# EAGLE board mMicroSD (EAGLE 6.2)
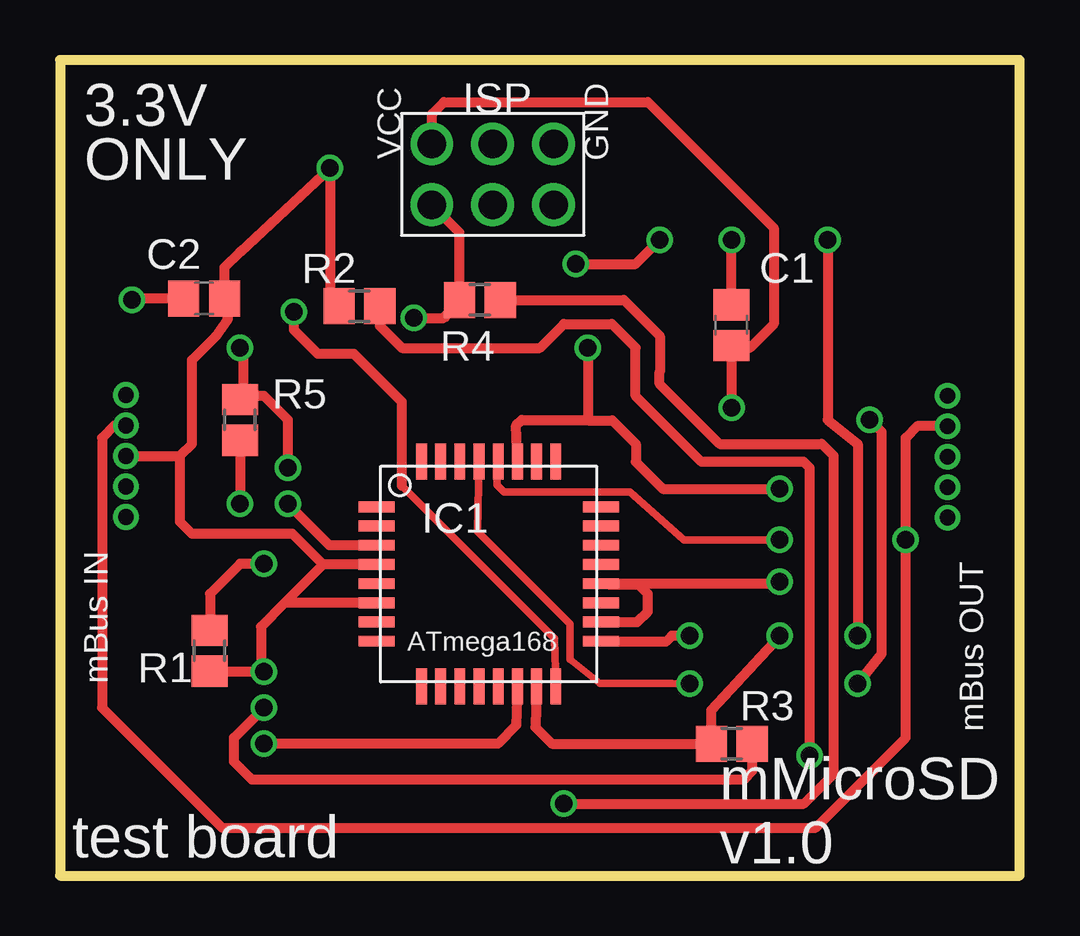
[diagram p0: board, top side]
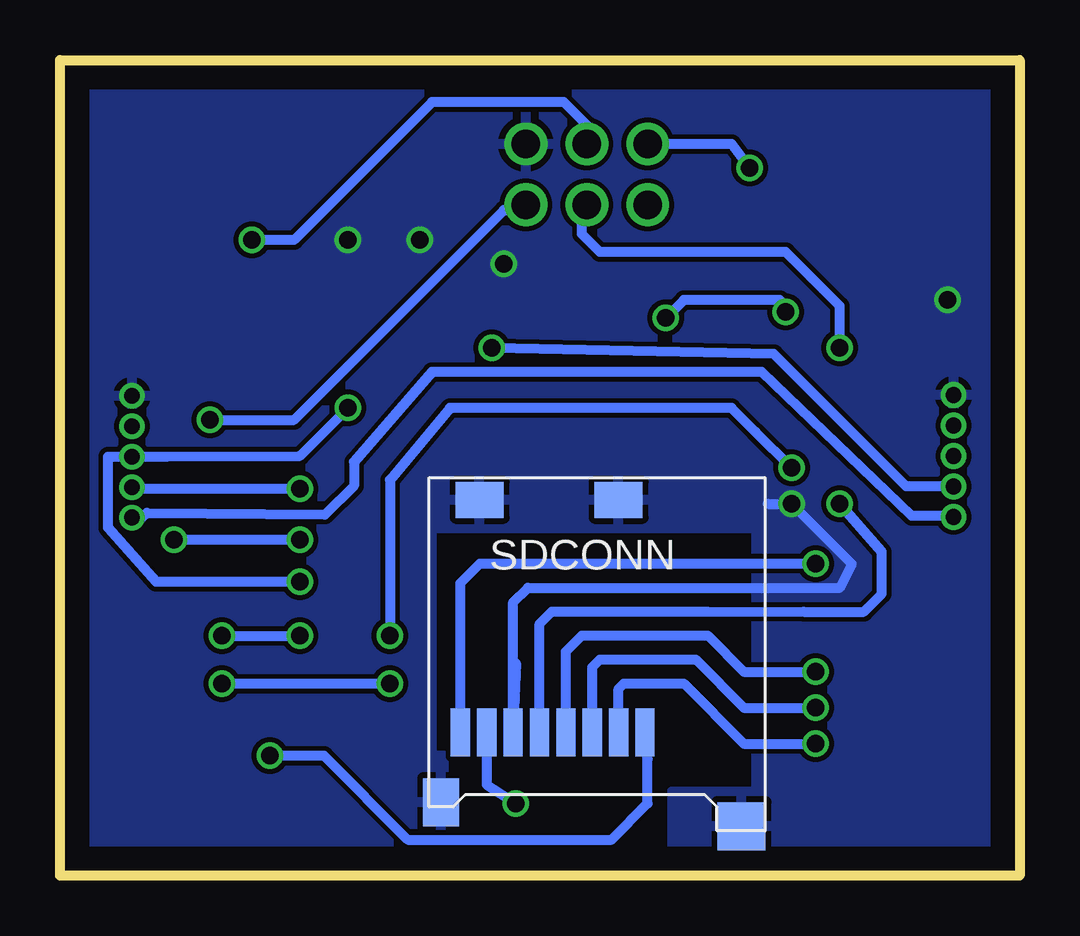
[diagram p1: board, bottom side, seen from below]

Size 40 x 34 mm. Coordinates in mm from the lower left corner, seen from the top.
Outline: 0,0 40,0 40,34 0,34 0,0
Copper layers (1*16): Top 0.035mm / dielectric 1.5mm / Bottom 0.035mm
Design rules: minimum track width 10mil, minimum drill 24mil, track to track 8mil, track to pad 8mil, pad to pad 8mil, via to via 8mil, smd to smd 8mil, copper to edge 40mil, drill to drill 8mil, minimum pad ring 8mil, minimum via ring 8mil, stop-mask expansion 4mil, vias tented up to drill 0mil, thermal gap 10mil

## Footprints (pad centres in the part's own frame; a part is rotated, then mirrored left to right if it is on the bottom)
C0805 = smd 1.3 x 1.5: 1 -0.85,0; 2 0.85,0
ATMEGA168 = smd 1.5 x 0.45: 1 -4.572,2.91; 2 -4.572,2.11; 3 -4.572,1.31; 4 -4.572,0.51; 5 -4.572,-0.29; 6 -4.572,-1.09; 7 -4.572,-1.89; 8 -4.572,-2.69; 17 4.793,-2.69; 18 4.793,-1.89; 19 4.793,-1.09; 20 4.793,-0.29; 21 4.793,0.51; 22 4.793,1.31; 23 4.793,2.11; 24 4.793,2.91 | smd 0.45 x 1.5: 9 -2.69,-4.572; 10 -1.89,-4.572; 11 -1.09,-4.572; 12 -0.29,-4.572; 13 0.51,-4.572; 14 1.31,-4.572; 15 2.11,-4.572; 16 2.91,-4.572; 25 2.91,4.793; 26 2.11,4.793; 27 1.31,4.793; 28 0.51,4.793; 29 -0.29,4.793; 30 -1.09,4.793; 31 -1.89,4.793; 32 -2.69,4.793
R2012 = smd 1.3 x 1.5: 1 -0.85,0; 2 0.85,0
101-00660-68-6 = smd 2 x 0.8: P$1 4.9,1; P$2 4.9,-0.1; P$3 4.9,-1.2; P$4 4.9,-2.3; P$5 4.9,-3.4; P$6 4.9,-4.5; P$7 4.9,-5.6; P$8 4.9,-6.7 | smd 1.5 x 2: P$9 -4.8,-0.1; P$10 -4.8,-5.9 | smd 2 x 1.5: P$11 7.8,-7.5 | smd 2 x 2.008: P$12 8.8,5.018
050-5 = drill 0.66 pad 0.914: P$1 0,0; P$2 1.27,0; P$3 2.54,0; P$4 3.81,0; P$5 5.08,0
ISP = drill 1.194: GND 5.08,0; MISO 0,-2.54; MOSI 2.54,0; RESET 5.08,-2.54; SCK 2.54,-2.54; VCC 0,0

## Placement (x,y rotation side)
C1  1uF  [C0805]  27.98,22.94 90 top
C2  1uF  [C0805]  6.01,24.06 180 top
IC1  ATMEGA168  [ATMEGA168]  17.76,12.46 0 top
R1  100k  [R2012]  6.23,9.37 90 top
R2  100k  [R2012]  12.48,23.73 180 top
R3  1k  [R2012]  28,5.5 180 top
R4  1k  [R2012]  17.5,24 180 top
R5  1k  [R2012]  7.5,19 90 top
SDCONN  101-00660-68-6  [101-00660-68-6]  16.61,10.86 270 bottom
U$1  050-5  [050-5]  37,20 270 top
U$2  050-5  [050-5]  2.75,14.95 90 top
U$3  ISP  [ISP]  15.5,30.5 0 top

## Library data of the parts
C1 C2 = resistor
IC1 SDCONN U$3 = zz-kent
R1-R5 = rcl
U$1 U$2 = zz-upenn

## Nets
GND: C1.2 C2.2 IC1.3 IC1.5 IC1.21 SDCONN.P$6 SDCONN.P$9 SDCONN.P$10 SDCONN.P$11 SDCONN.P$12 U$1.P$1 U$2.P$5 U$3.GND
N$1: U$1.P$5 U$2.P$1
N$2: IC1.27 U$1.P$4 U$2.P$2
N$3: IC1.28 U$1.P$2 U$2.P$4
N$4: IC1.14 SDCONN.P$2
N$5: R3.1 SDCONN.P$3
N$6: R4.1 SDCONN.P$7
N$7: IC1.16 R4.2 U$3.MISO
N$8: IC1.15 R3.2 U$3.MOSI
N$9: IC1.29 U$3.RESET
N$12: R1.2 SDCONN.P$8
N$13: R2.1 SDCONN.P$1
N$14: IC1.17 R5.2 U$3.SCK
N$15: R5.1 SDCONN.P$5
VCC: C1.1 C2.1 IC1.4 IC1.6 IC1.18 IC1.20 R1.1 R2.2 SDCONN.P$4 U$1.P$3 U$2.P$3 U$3.VCC

## Tracks (layer width: path | path; a pad name or v marks a point on that pad's centre or on a via)
GND  (via drill 0.71)
  Top 0.406: U$2.P$5 2.77,20.01 2.51,20.01 | 27.98,23.77 C1.2 27.98,26.48 v28,26.5 | U$1.P$1 | C2.2 3.06,24.06 v3,24 | IC1.3 11.23,13.77 v9.5,15.5 | v21.5,25.5 24,25.5 v25,26.5
  Bottom 0.406: 21,8.85 SDCONN.P$6 21.11,11.39 20.5,12 7.5,12 7,13 v9.5,15.5 | v9.5,15.5 | 10.5,15.5 v9.5,15.5 | v9.5,15.5
  pour Bottom: 0,0 0,34 40,34 40,0 24,0 24,5 24.5,5 24.5,14.5 11,14.5 11,3.5 14.5,3.5 14.5,0
N$1
  Bottom 0.406: U$2.P$1 2.8,15 4.5,15 10.75,21 24.5,21 27.75,17.25 27.75,16.25 28.95,15.04 36.38,15.12 36.58,14.92 U$1.P$5
N$2  (via drill 0.71)
  Top 0.406: v22,22 22,18.97 | v30,16.12 25.12,16.12 24,17.25 24,18 23.03,18.97 22,18.97 | IC1.27 19.02,18.77 19.25,19 21.97,19 22,18.97
  Bottom 0.406: U$2.P$2 4.72,16.22 10.25,21.75 v22,22 | v30,16.12 36.69,16.12 U$1.P$4
N$3  (via drill 0.71)
  Top 0.305: IC1.28 18.21,16.29 18.5,16 23.75,16 26,14 v30,14
  Top 0.406: U$1.P$2 35.73,18.73 35.25,18.25 v35.25,14 35.25,5.75 31.5,2 6.75,2 1.75,7 1.75,18.25 2.26,18.76 U$2.P$4
  Bottom 0.406: v30,14 v35.25,14
N$4  (via drill 0.71)
  Top 0.406: IC1.14 19.02,6.26 18.25,5.5 v8.5,5.5
  Bottom 0.406: SDCONN.P$2 16.71,7.79 16.5,8 14,8 | 14,8 | 14,8 11.5,5.5 v8.5,5.5
N$5  (via drill 0.71)
  Top 0.406: R3.1 28.85,4.35 28.5,4 8,4 7.25,4.75 7.25,5.75 v8.5,7
  Bottom 0.406: SDCONN.P$3 17.81,8.69 17.5,9 13.5,9 | 13.5,9 | 13.5,9 11.5,7 v8.5,7
N$6  (via drill 0.71)
  Top 0.406: v21,3 31,3 32.25,4.25 32.25,17.5 31.75,18 27.5,18 25,20.5 25,21 | R4.1 23.5,24 25,22.5 25,21 | 25,21
  Bottom 0.406: SDCONN.P$7 22.21,3.79 v21,3
N$7  (via drill 0.71)
  Top 0.305: IC1.16 20.61,9.88 14.25,16.25
  Top 0.406: v14.75,23.25 16,23.25 R4.2 16.65,26.81 U$3.MISO | v9.75,23.5 9.75,22.75 10.75,21.75 12.25,21.75 14.25,19.75 14.25,16.25
  Bottom 0.406: v9.75,23.5 10,24 14,24 v14.75,23.25
N$8  (via drill 0.71)
  Top 0.406: v32,26.5 32,19 33.25,18 v33.25,10 | v30,10 27.15,6.9 R3.2 20.5,5.5 19.82,6.18 IC1.15
  Bottom 0.406: v33.25,10 v30,10 | U$3.MOSI 18.04,31.29 19,32.25 24.5,32.25 30.25,26.5 v32,26.5
N$9  (via drill 0.71)
  Top 0.305: v26.25,8 25.5,8 22.5,8 21.25,9 21.25,10.5 17.41,14.34 IC1.29
  Top 0.406: v33.25,8 34.25,9.25 34.25,18.5 v33.75,19
  Bottom 0.406: v33.75,19 30.25,19 21.5,27.75 20.79,27.75 U$3.RESET | v26.25,8 v33.25,8
N$12  (via drill 0.71)
  Top 0.406: v8.5,13 7.5,13 6.25,11.75 6.25,10.24 R1.2
  Bottom 0.406: SDCONN.P$8 23.31,12.19 22.5,13 v8.5,13 | v8.5,13
N$13  (via drill 0.71)
  Top 0.406: 24,22 23,23 21,23 20,22 14.25,22 13.33,22.92 R2.1 | v31.25,5 31.25,17 31,17.25 26.75,17.25 24,20 24,22 | 24,22
  Bottom 0.406: v31.25,5 29,5 25.5,1.5 17,1.5 15.5,3 15.5,4.85 SDCONN.P$1 | v31.25,5
N$14  (via drill 0.71)
  Top 0.406: v9.5,17 9.5,19 8.5,20 7.65,20 | 7.65,20 R5.2 | 7.65,20 7.65,21.85 v7.5,22 | v26.25,10 25.5,10 25.25,9.75 22.89,9.75 IC1.17
  Bottom 0.406: v9.5,17 11,18.5 12,19.5 23.75,19.5 26.25,16.5 v26.25,10 | v7.5,22 7.5,23.75 9.75,26 17.5,26 18.25,26.75 18.25,27.75 U$3.SCK
N$15  (via drill 0.71)
  Top 0.406: R5.1 v7.5,15.5
  Bottom 0.406: SDCONN.P$5 20.01,10.49 19.5,11 13,11 9,11 6.5,11 5.75,11.75 5.75,13.5 v7.5,15.5
VCC  (via drill 0.71)
  Top 0.406: U$2.P$3 4.99,17.49 | v28,19.5 28,20.93 C1.1 28.07,22 28.75,22 29.75,23 29.75,27 24.5,32.25 16,32.25 15.5,31.75 U$3.VCC | R2.2 11.25,23.85 v11.25,29.5 7.5,26 6.86,25.36 C2.1 7,23.2 6.5,22.5 5.5,21.5 5.5,18 4.99,17.49 | IC1.6 9.37,11.37 | 9.37,11.37 8.38,10.38 8.38,8.62 v8.5,8.5 6.25,8.5 R1.1 | IC1.4 10.97,12.97 | 10.97,12.97 9.37,11.37 | IC1.18 24.07,10.57 24.5,11 24.5,11.75 24.12,12.12 22.91,12.12 IC1.20 29.92,12.17 v30,12.25 | 10.97,12.97 9.69,14.25 5.5,14.25 5,14.75 5,17.48 4.99,17.49
  Bottom 0.406: v28,19.5 30,17.5 35.54,17.46 U$1.P$3 38,17.46 38,14.5 36,12.25 v30,12.25 | v11.25,29.5 12,30.5 U$3.VCC | SDCONN.P$4 18.91,9.34 18.25,10 13,10 11.5,8.5 v8.5,8.5

## Text on the board
tNames: 3.3V | ONLY | mBus IN | mBus OUT | test board | mMicroSD / v1.0